# Altium PCB pcb_mpptCharger.PcbDoc
Units mm, origin at the board's own origin, x right, y up, seen from the top; angles counter-clockwise.
Board outline 100 x 100 mm, 2 copper layers (Top Layer, Bottom Layer); 44 components, 22 nets, 103 pads, 14 vias.
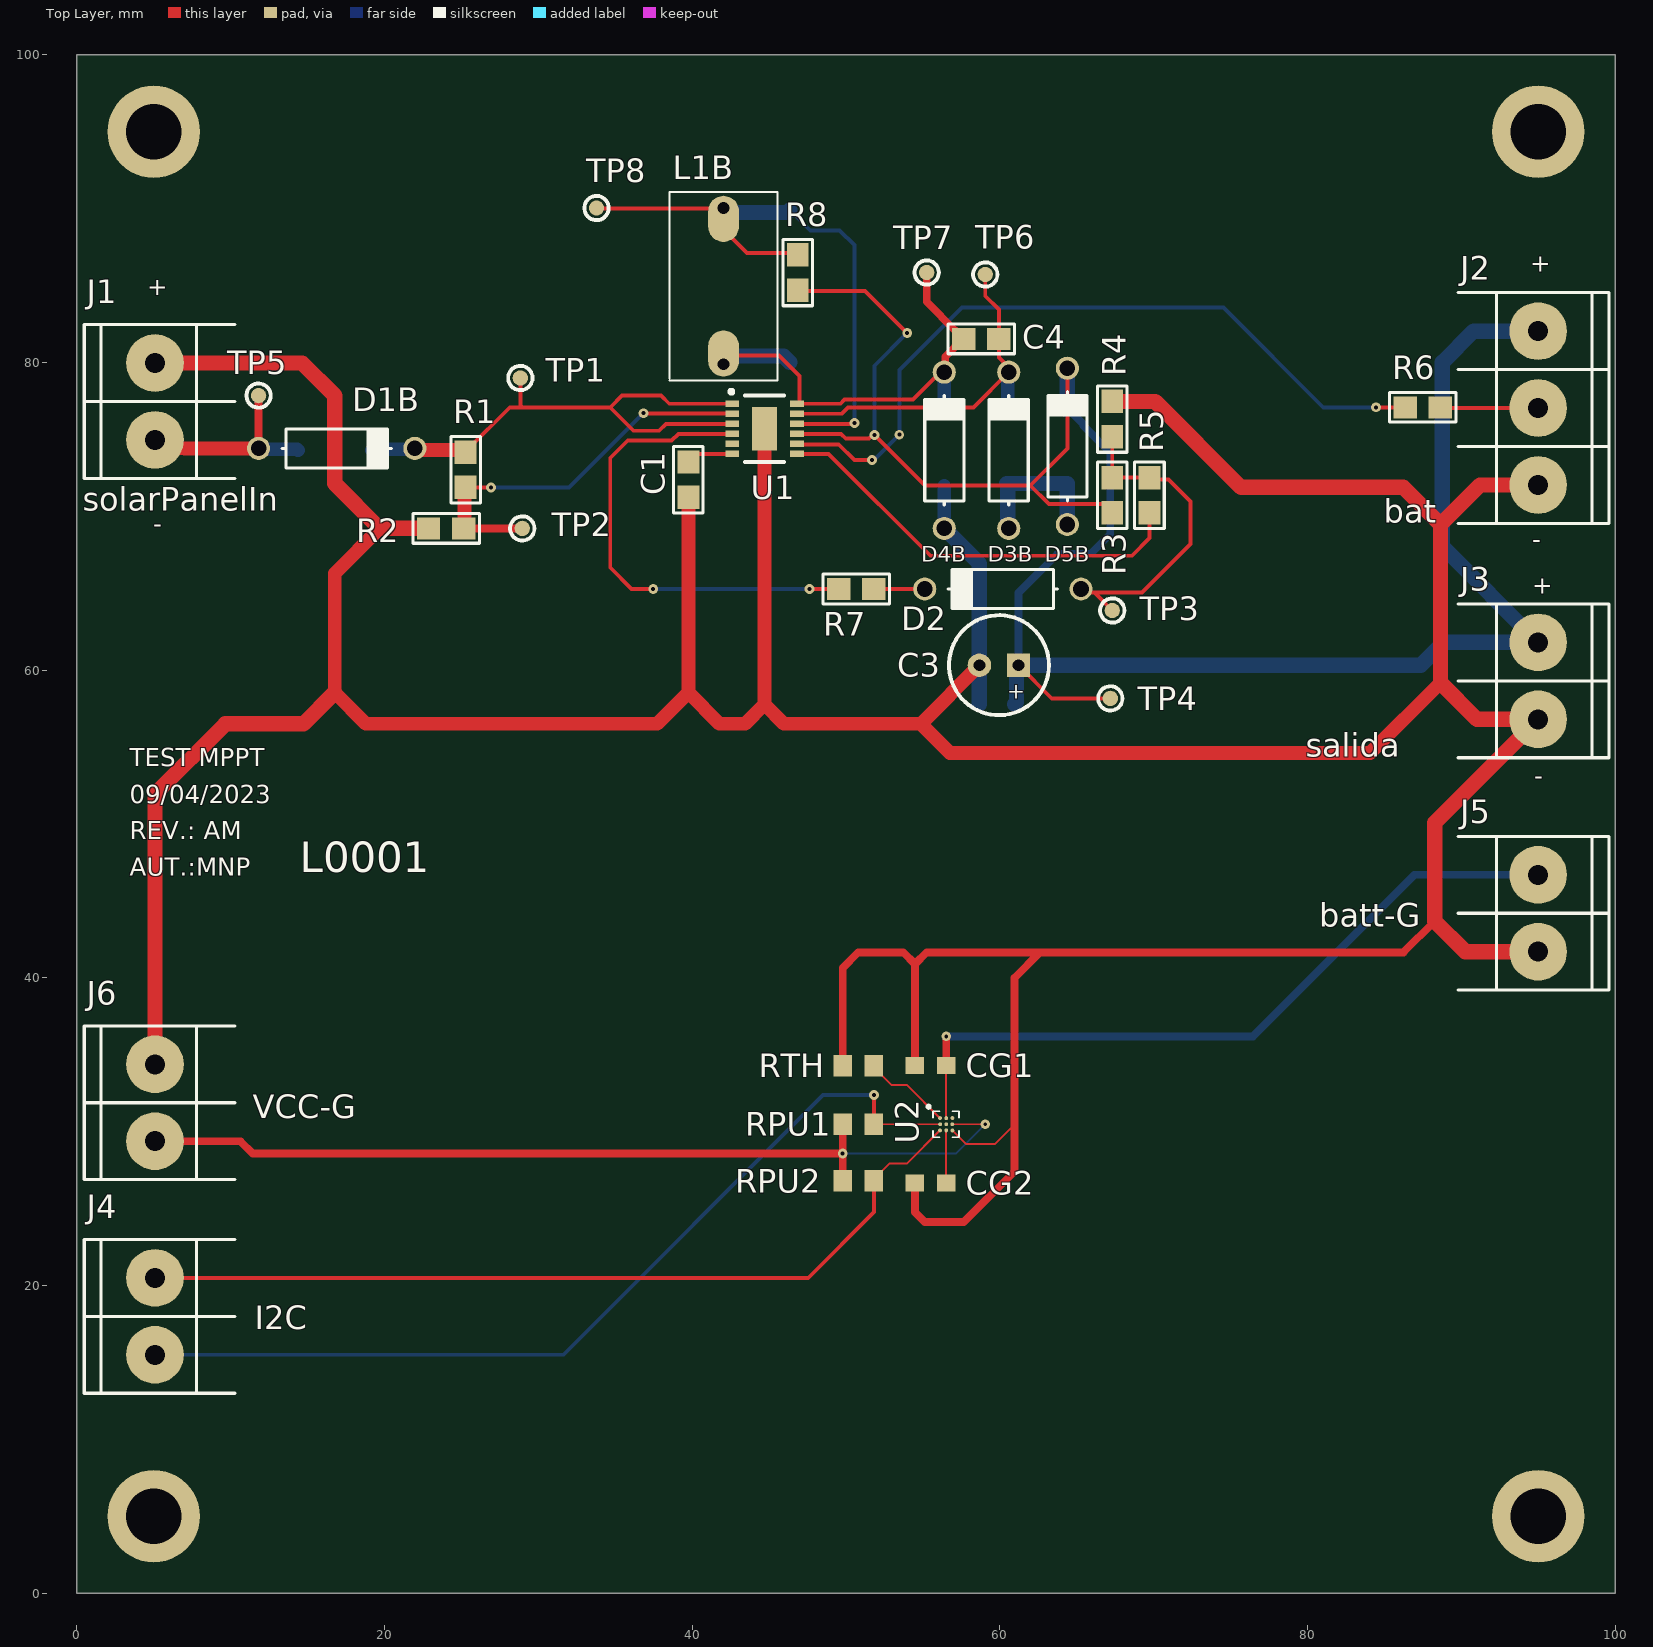
[diagram p0: Top Layer view]
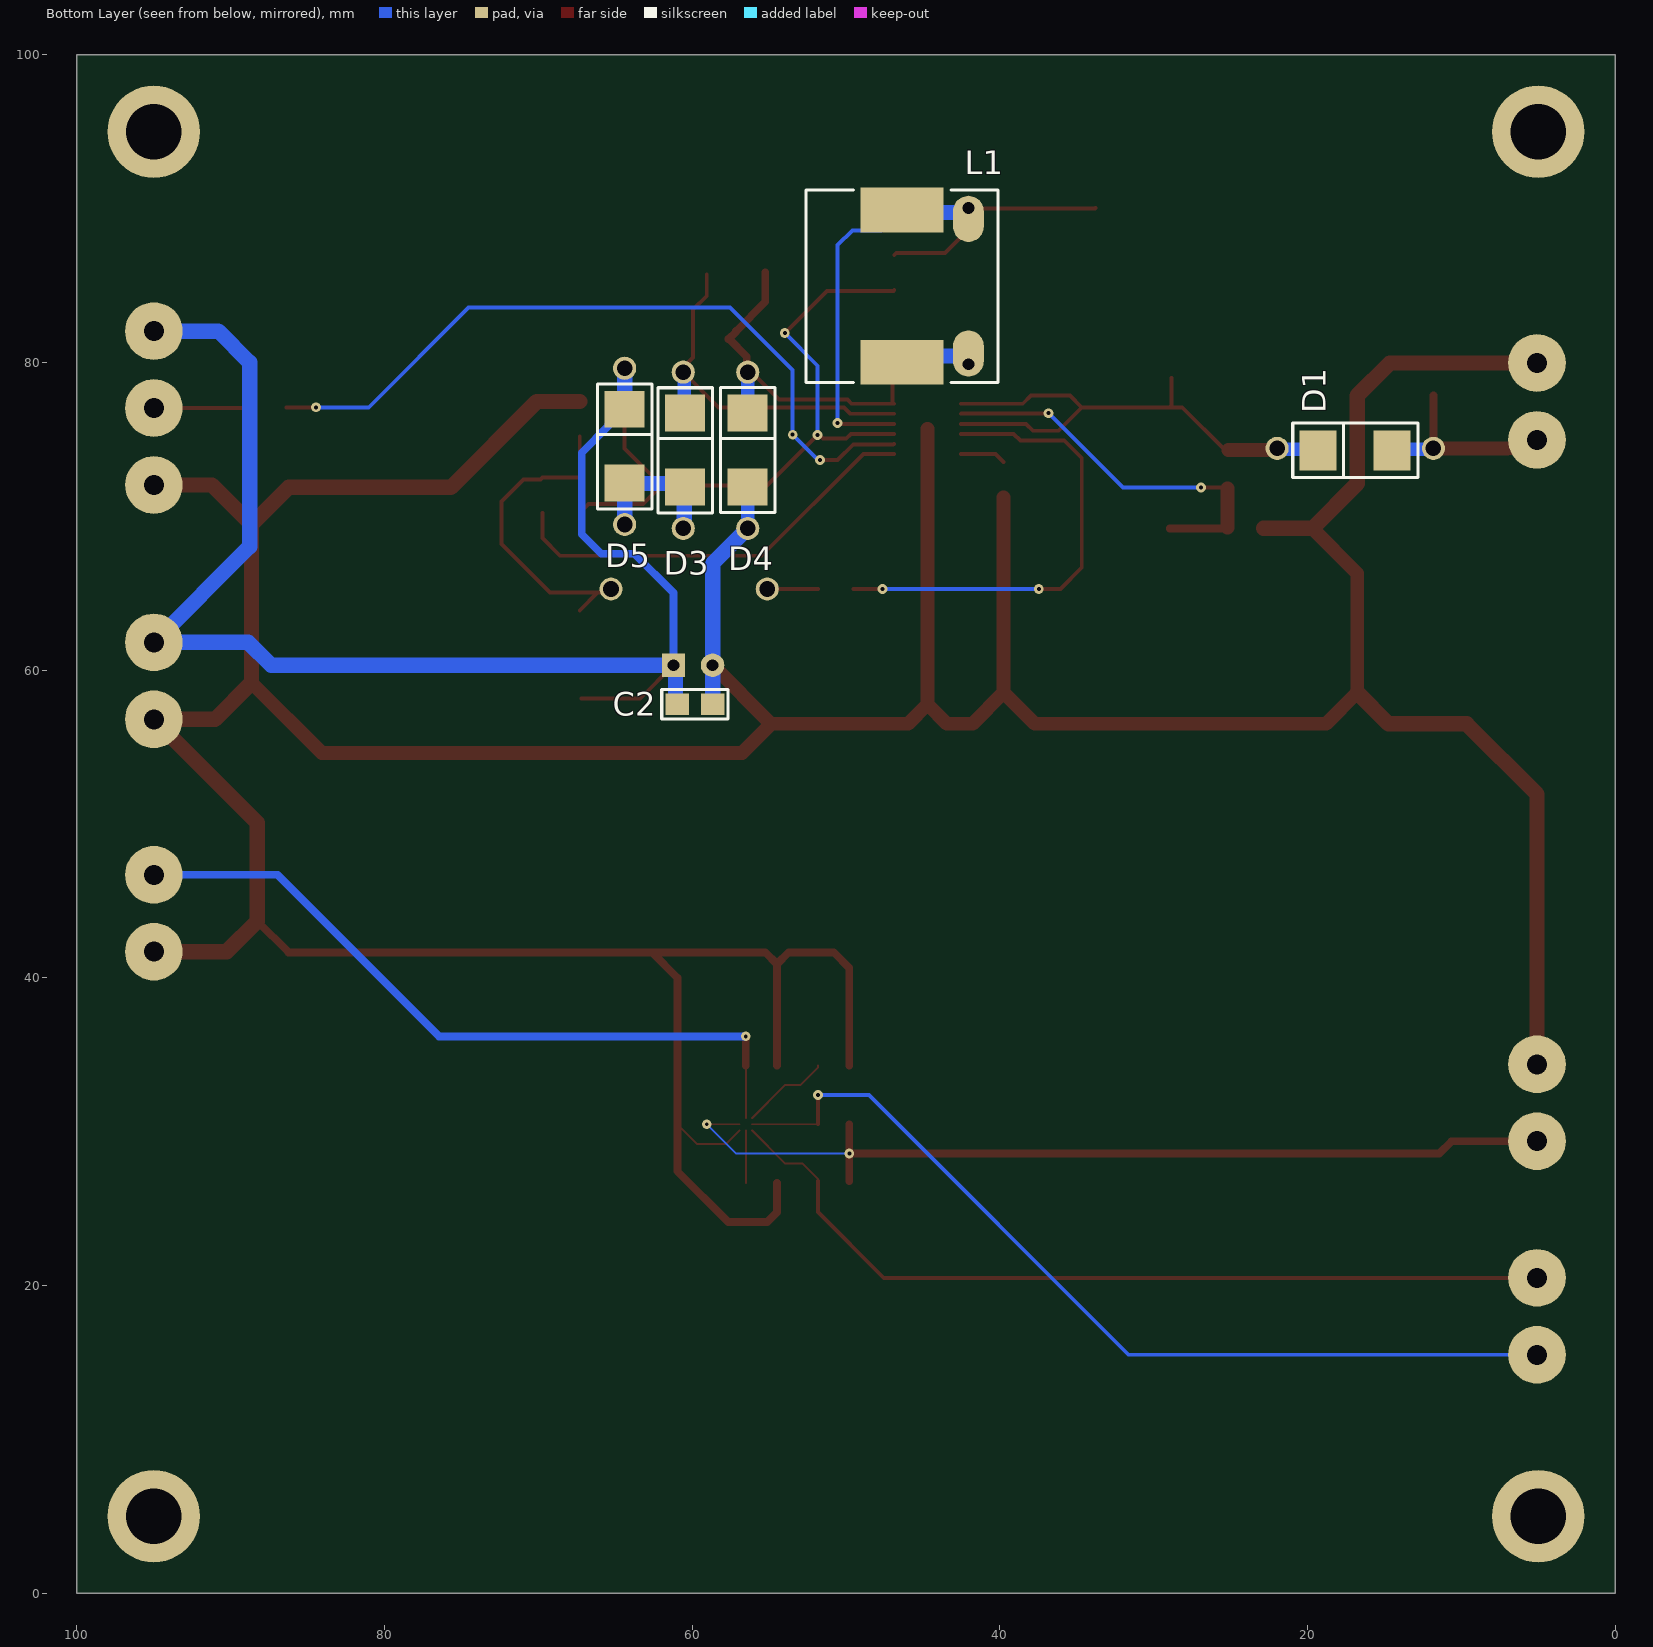
[diagram p1: Bottom Layer view, seen from below]
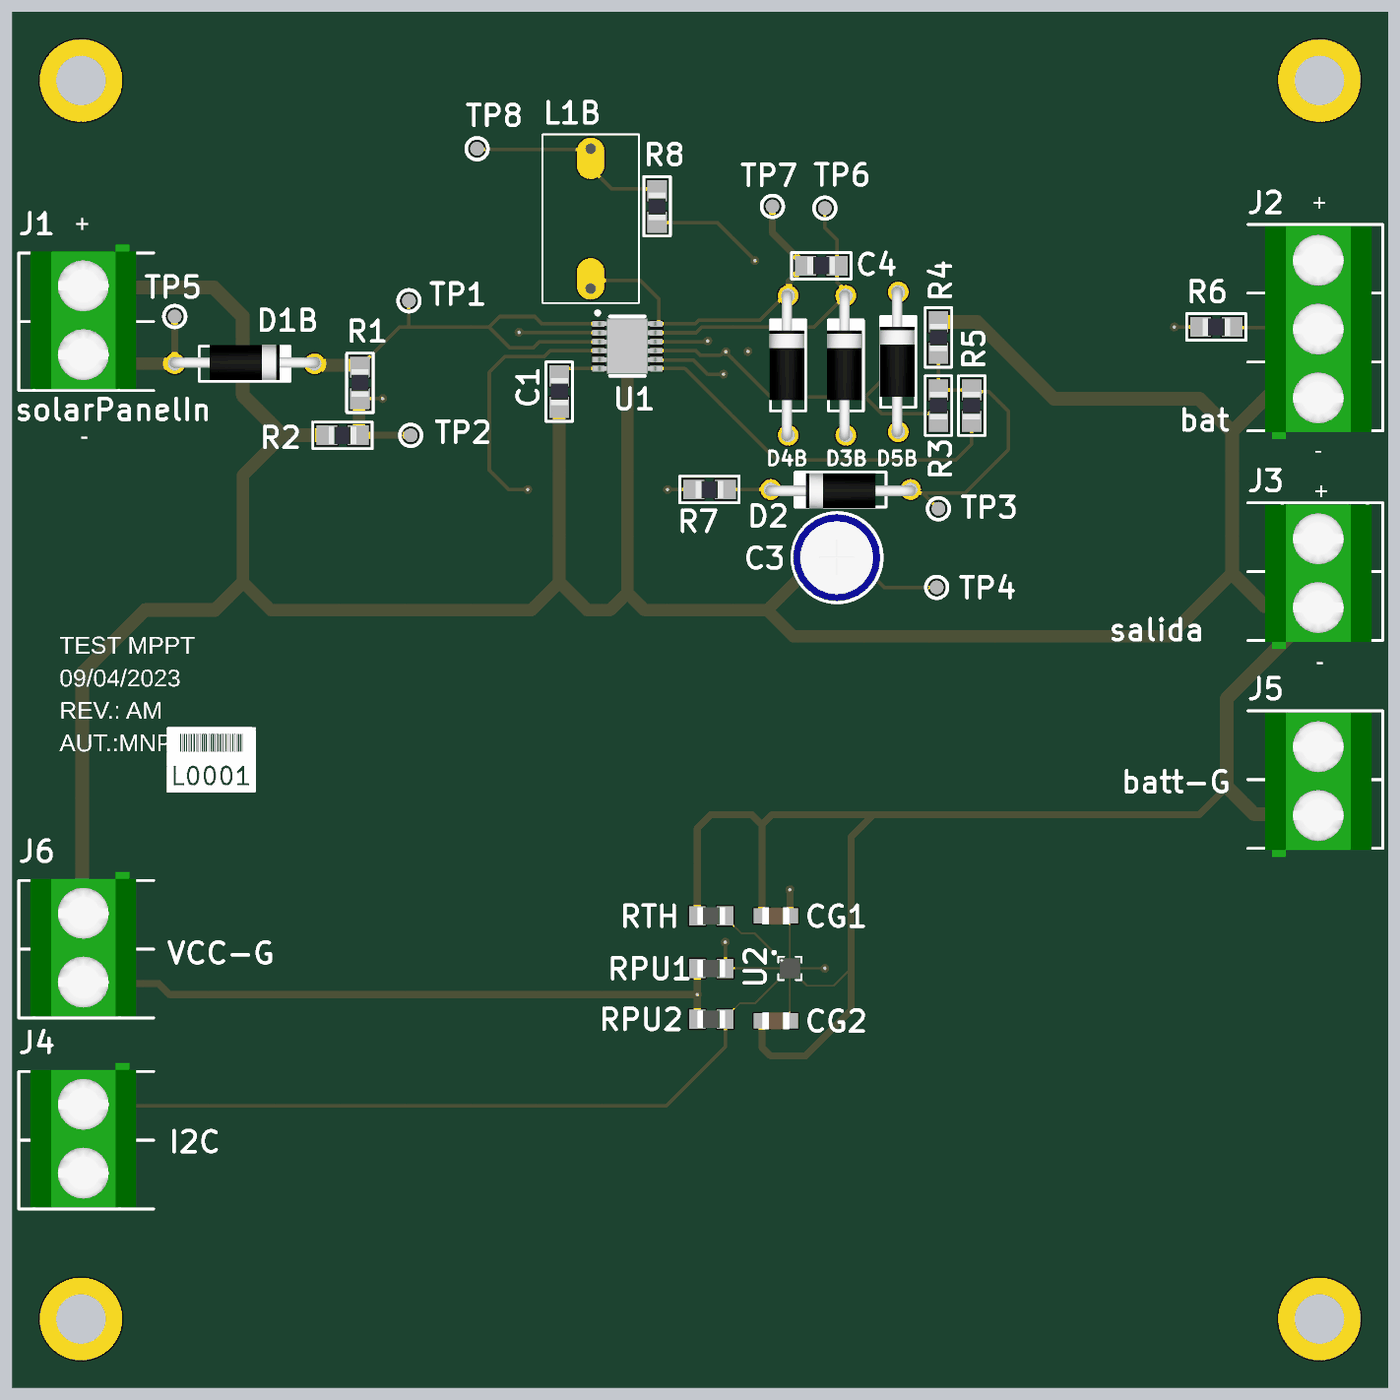
[diagram p2: 3D render of the assembled board from above, using the file's embedded part models]
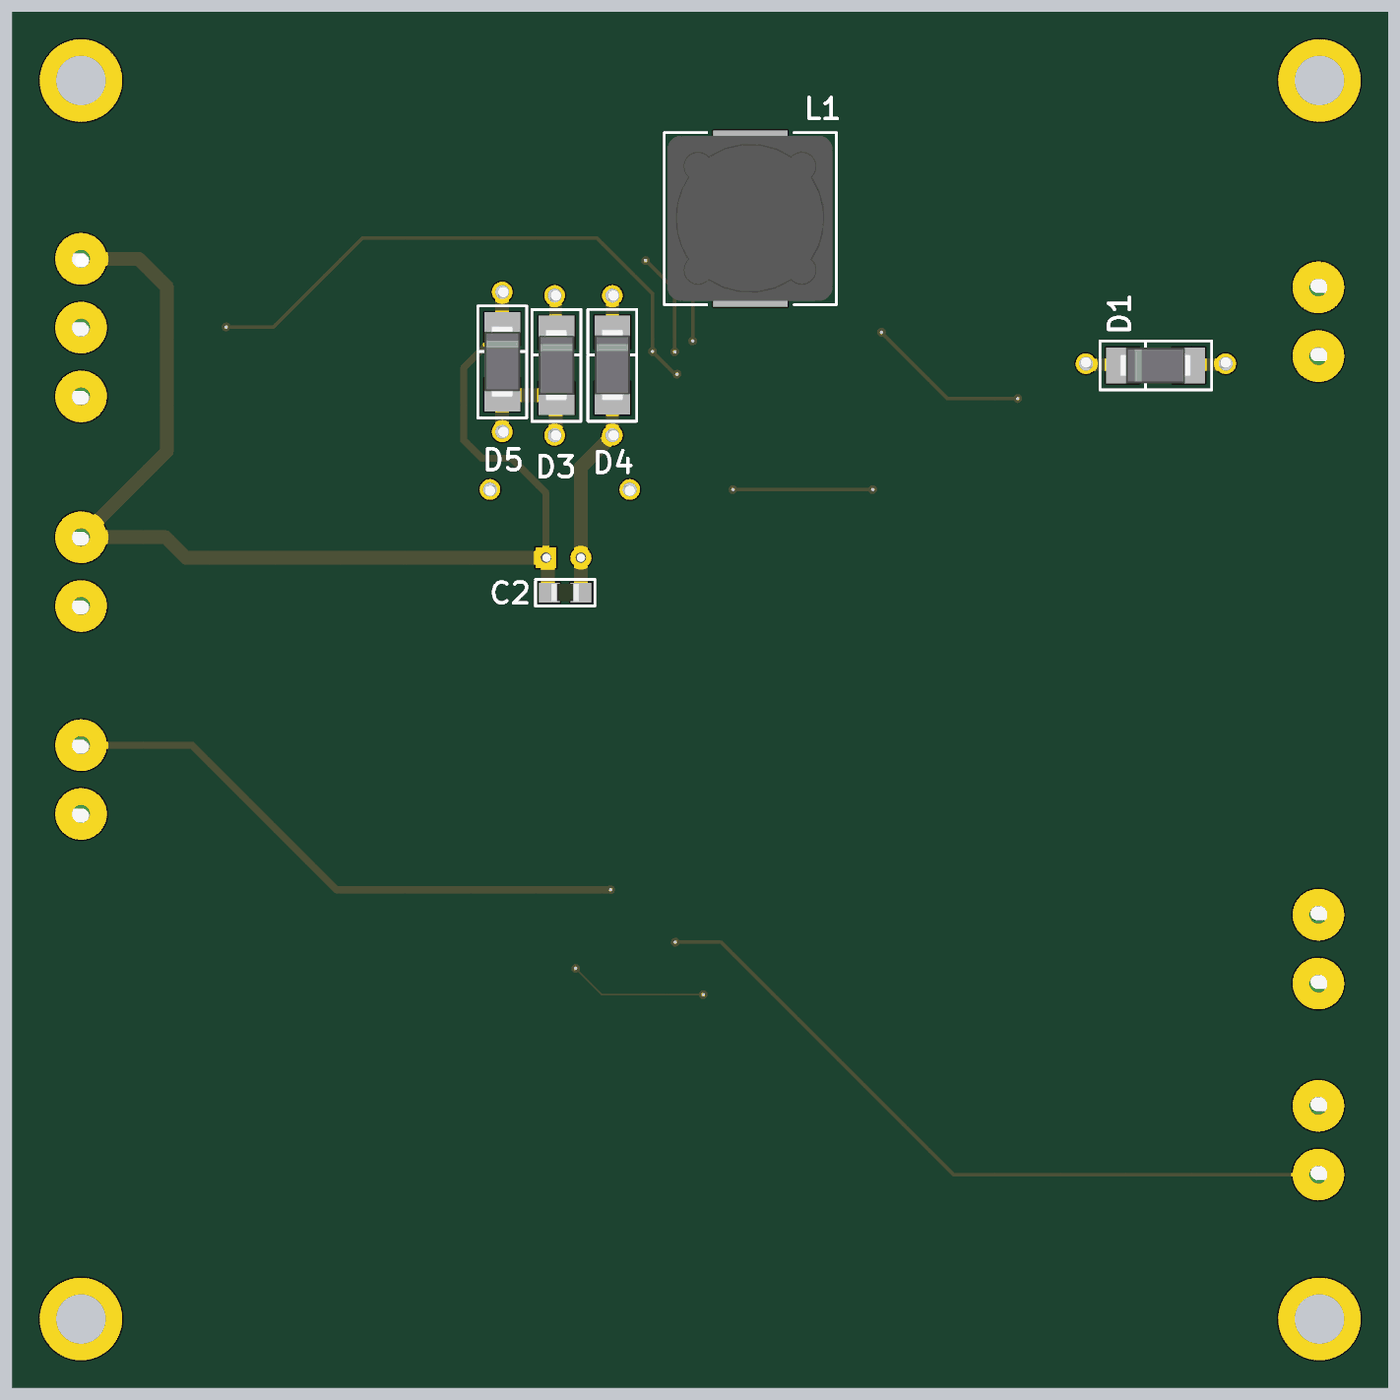
[diagram p3: 3D render of the assembled board from below, using the file's embedded part models]

## Layer stack, top to bottom
Top Solder: solder mask 0.0102, Solder Resist, Dk 3.5
Top Layer: signal copper 0.0356
Dielectric 1: dielectric 0.32, FR-4, Dk 4.8
Bottom Layer: signal copper 0.0356
Bottom Solder: solder mask 0.0102, Solder Resist, Dk 3.5

## Board outline
0,0 100,0 100,100 0,100

## Design rules (kind name [scope] priority, off if disabled: settings)
Clearance [All] p1: gap=0.254 ignorepadtopadclearanceinfootprint=FALSE except(0: Arc-Hole Track-Hole SMDPad-Hole THPad-Hole Via-Hole Fill-Hole Poly-Hole Region-Hole Text-Hole; 0.127: Arc-SMDPad Track-SMDPad SMDPad-SMDPad)
HoleSize [All] p1: absolutevalues=TRUE maxlimit=3.81 minlimit=0.025 maxpercent=80.000 minpercent=20.000
MinimumSolderMaskSliver [All] p1: minsoldermaskwidth=0.102
PolygonConnect [All] p1: connectstyle=Relief reliefconductorwidth=0.254 reliefentries=4 polygonreliefangle="90 Angle" airgapwidth=0.254
RoutingVias [All] p1: holewidth=0.711 width=1.27 viastyle="Through Hole" minholewidth=0.254 minwidth=0.635 maxholewidth=0.711 maxwidth=1.27
SilkToSolderMaskClearance [IsPad] p1: minsilkscreentomaskgap=0.15 clearancetoexposedcopper=TRUE
SolderMaskExpansion [All] p1: expansion=0.102 istentingtop=FALSE
Width [All] p1: maxlimit=1 minlimit=0.127 preferedwidth=0.254
27 further rules are at their usual default settings.

## Components (designator, comment, footprint, x,y, rotation, side; value= is the part's Value field where it differs from the comment)
C1 "CAP" 0805 39.751,72.39 r270 top value=4.7u
C2 "CAP" 0805 59.817,57.785 r180 bottom value=10u
C3 "CAPPOL" CAP100RP2 59.944,60.325 r180 top value=100u
C4 "CAP" 0805 58.801,81.534 r0 top value=1u
CG1 "0.1uF" 0805-CAP-TDK 55.499,34.29 r180 top
CG2 "0.47uF" 0805-CAP-TDK 55.499,26.67 r0 top
D1 "CMSH3-40MA" SMAK 14.504,74.295 r0 bottom
D1B "DIODO SCHOTTKY" DO41 16.891,74.422 r0 top
D2 "DIODO" DO41 60.198,65.278 r180 top value=1n4148
D3 "CMSH3-40MA" SMAK 60.452,71.907 r90 bottom
D3B "DIODO SCHOTTKY" DO41 60.579,74.295 r90 top
D4 "CMSH3-40MA" SMAK 56.388,71.917 r90 bottom
D4B "DIODO SCHOTTKY" DO41 56.388,74.295 r90 top
D5 "CMSH3-40MA" SMAK 64.389,72.161 r90 bottom
D5B "DIODO SCHOTTKY" DO41 64.389,74.549 r90 top
J1 "solarPanelIn" BORNERA2 5.08,77.47 r0 top
J2 "bat" BORNERA3 94.996,77.042 r180 top
J3 "salida" BORNERA2 94.996,59.309 r180 top
J4 "I2C" BORNERA2 5.08,17.994 r0 top
J5 "batt-G" BORNERA2 94.996,44.196 r180 top
J6 "VCC-G" BORNERA2 5.08,31.877 r0 top
L1 "INDUCTOR" "WE-PD SERIES" 46.355,84.963 r270 bottom
L1B "INDUCTOR_FM" INDUCTOR_FM 42.037,84.963 r270 top
R1 "RES" 0805 25.273,73.025 r90 top value=TBD
R2 "RES" 0805 24.003,69.215 r0 top value=TBD
R3 "RES" 0805 67.31,71.374 r270 top value=TBD
R4 "RES" 0805 67.31,76.327 r270 top value=TBD
R5 "RES" 0805 69.723,71.374 r270 top value=TBD
R6 "RES" 0805 87.503,77.089 r180 top value=TBD
R7 "RES" 0805 50.673,65.278 r180 top value=TBD
R8 "RES" 0805 46.863,85.852 r90 top value=TBD
RPU1 "2K2" 0805-RES-PANASONIC 50.8,30.48 r0 top
RPU2 "2K2" 0805-RES-PANASONIC 50.8,26.797 r180 top
RTH "TBD" 0805-RES-PANASONIC 50.8,34.29 r0 top
TP1 "TP" TP 28.829,78.994 r0 top
TP2 "TP" TP 28.956,69.215 r90 top
TP3 "TP" TP 67.31,63.881 r90 top
TP4 "TP" TP 67.183,58.166 r90 top
TP5 "TP" TP 11.811,77.851 r90 top
TP6 "TP" TP 59.055,85.725 r90 top
TP7 "TP" TP 55.245,85.852 r90 top
TP8 "TP" TP 33.782,90.043 r90 top
U1 "LT3652EMSE#PBF" LT3652EMSE#PBF 44.704,75.692 r0 top
U2 "MAX17262REWL+T" "AD 9-WLP" 56.515,30.48 r0 top

## Footprints (in the part's own frame and the unit in brackets; to place one, negate y for a bottom-side part, rotate by r counter-clockwise, add the part's x,y. Pads: shape width x height; smd on the part's side, far side on the other; paste and mask are expansions set on the pad)
0805 [mil] "Pasivo 0805"
  rect 60x56 smd: 1(-45,0) 2(45,0)
  silkscreen extent -85,-38 85,38, body extent -40,-25 39,25, height 15
0805-CAP-TDK [mm]
  rect 1.2x1.1 smd: 1(-1.016,0) 2(1.016,0)
  body extent -1,-0.63 1,0.63, height 1.45
0805-RES-PANASONIC [mm]
  rect 1.2x1.4 smd: 1(-1.016,0) 2(1.016,0)
  body extent -1,-0.63 1,0.63, height 0.6
"AD 9-WLP" [mm]
  round 0.25 smd mask+0.1: A1(-0.4,0.4) A2(0,0.4) A3(0.4,0.4) B1(-0.4,0) B2(0,0) B3(0.4,0) C1(-0.4,-0.4) C2(0,-0.4) C3(0.4,-0.4)
  silkscreen extent -1.24,-0.84 0.84,1.24, body extent -0.73,-0.72 0.73,0.72, height 0.69
BORNERA2 [mm] "Bornera con Tornillos 5mm separación"
  round 3.75 hole 1.3: 1(0,2.5) 2(0,-2.5)
  silkscreen extent -4.6,-5 5.2,5, body extent -3.76,-4.89 3.94,5.61, height 10
BORNERA3 [mm] "Bornera con Tornillos 5mm separación"
  round 3.75 hole 1.3: 1(0,5) 2(0,0) 3(0,-5)
  silkscreen extent -4.6,-7.5 5.2,7.5, body extent -3.76,-7.39 3.94,8.11, height 10.05
CAP100RP2 [mil] "Body diameter 6.5mm"
  rect 60x60 hole 30: 1(-50,0)
  round 60 hole 30: 2(50,0)
  silkscreen extent -128,-128 128,128, body extent -124,-125 126,125, height 454
DO41 [mm]
  round 1.5 hole 1.016: 1(-5.08,0) 2(5.08,0)
  silkscreen extent -3.56,-1.27 3.56,1.27, body extent -5.46,-1.19 5.46,1.37, height 2.03
INDUCTOR_FM [mm]
  oval 3x2 hole 0.762 copper offset 0.7,0: 1(-5.08,0)
  oval 3x2 hole 0.762 copper offset -0.7,0: 2(5.08,0)
  silkscreen extent -6.13,-3.5 6.13,3.5
LT3652EMSE#PBF [mm]
  rect 0.889x0.42 smd mask+0.07: 1(-2.107,1.625) 2(-2.107,0.975) 3(-2.107,0.325) 4(-2.107,-0.325) 5(-2.107,-0.975) 6(-2.107,-1.625) 7(2.107,-1.625) 8(2.107,-0.975) 9(2.107,-0.325) 10(2.107,0.325) 11(2.107,0.975) 12(2.107,1.625)
  rect 1.651x2.845 smd mask+0.07: 13(0,0)
  silkscreen extent -2.29,-2.16 1.27,2.54, body extent -2.45,-2.02 2.45,2.02, height 1.1
SMAK [mm]
  rect 2.4x2.6 smd: 1(0,0) 2(4.8,0)
  silkscreen extent -1.68,-1.78 6.45,1.78, body extent -0.19,-1.3 5.01,1.3, height 2.4
TP [mm]
  round 1 smd: 1(0,0)
  silkscreen extent -0.79,-0.79 0.79,0.79
"WE-PD SERIES" [mm] "POWER-CHOKE WE-PD"
  rect 2.9x5.4 smd: 1(-4.95,0) 2(4.95,0)
  silkscreen extent -6.25,-6.25 6.25,6.25, body extent -6.03,-6.03 5.97,5.97, height 7.95

## Part data
CG1 CG2: library part CAP-SMD
D1 D3 D4 D5: library part "DIODO SCHOTTKY"
J1 J3 J4 J5 J6: library part "BORNERA 2"
J2: library part "BORNERA 3"
L1B: library part INDUCTOR_1
RPU1 RPU2 RTH: library part RES-SMD
U1: "Power Tracking 2A Battery Charger for Solar Power"
U2: "Battery Fuel Gauge IC LiFePO4/Li-ion 9-WLP (1.47x1.45)"

## Free pads (board coordinates)
  round 6 hole 3.6: 6(5,5) 6(5,95) 6(95,5) 6(95,95)

## Via types
v1: diameter 0.635, hole 0.254, Top Layer to Bottom Layer, tented both sides, 14 vias

## Nets (pads, with @x,y where several pads share a name; then routed paths per layer and width w, separated by ;. In a path a pad name is that pad's centre, name@x,y a point inside that pad or via, vN(x,y) a via of type N, cw(c..) or ccw(c..) an arc to the next point about the centre after c; other vN are vias at no path point)
BAT_TEMP: J2.2 R6.1 | length 6.4
  Top Layer w0.254: R6.1 88.693,77.042 J2.2
BATT_G: CG1.1 J5.2 U2.A2 | length 48.1
  Top Layer w0.127: U2.A2 CG1.1
  Top Layer w0.508: CG1.1 v1(56.515,36.195)
  Bottom Layer w0.508: v1(56.515,36.195) 76.454,36.195 86.955,46.696 J5.2
GND: C1.2 C2.2 C3.2 CG1.2 CG2.1 D4.1 D4B.1 J1.1 J2.1 J3.1 J5.1 J6.1 R2.1 R4.1 RTH.1 U1.13 U2.C3 | length 355
  Top Layer w0.127: U2.C3 57.785,29.21 59.69,29.21 60.96,30.48
  Top Layer w0.508: RTH.1 49.784,40.64 50.8,41.656 53.721,41.656 54.483,40.894 ; CG2.1 54.483,24.765 55.118,24.13 57.658,24.13 60.96,27.432 60.96,30.48 60.96,40.005 62.611,41.656 ; CG1.2 54.483,40.894 ; 88.265,43.688 86.233,41.656 62.611,41.656 ; 54.483,40.894 55.245,41.656 62.611,41.656
  Top Layer w0.9: 19.685,69.215 16.764,66.294 16.764,58.547 18.796,56.515 37.719,56.515 39.751,58.547 ; C1.2 39.751,58.547 ; U1.13 44.704,57.785 ; C3.2 54.864,56.515 ; 88.646,59.182 84.074,54.61 56.769,54.61 54.864,56.515 ; 39.751,58.547 41.783,56.515 43.434,56.515 44.704,57.785 ; 44.704,57.785 45.974,56.515 54.864,56.515
  Top Layer w1: J6.1 5.08,51.943 9.652,56.515 14.732,56.515 16.764,58.547 ; J1.1 14.645,79.97 16.764,77.851 16.764,72.136 19.685,69.215 R2.1 ; R4.1 70.104,77.47 75.692,71.882 86.233,71.882 88.646,69.469 ; J5.1 90.257,41.696 88.265,43.688 88.265,50.078 J3.1 91.019,56.809 88.646,59.182 88.646,69.469 ; J2.1 91.219,72.042 88.646,69.469
  Bottom Layer w0.9: D4B.1 D4.1@56.388,71.969
  Bottom Layer w1: D4B.1 58.674,66.929 C3.2 C2.2
NetC1_1: C1.1 U1.6 | length 3
  Top Layer w0.254: C1.1 40.284,74.066 U1.6@42.52,74.066
NetC4_1: C4.1 D4.2 D4B.2 L1.2 L1B.2 TP7.1 U1.12 | length 33.1
  Top Layer w0.254: L1B.2@42.037,80.137 42.364,80.464 45.647,80.464 46.99,79.121 46.99,77.406 U1.12@46.901,77.318 ; U1.12@46.888,77.318 U1.12@46.901,77.318 ; D4B.2 56.134,79.375 54.356,77.597 49.915,77.597 49.635,77.318 U1.12@46.901,77.318
  Top Layer w0.5: TP7.1 55.245,83.947 57.146,82.046 57.146,81.995 C4.1@57.607,81.534 ; D4B.2 56.452,79.439 56.452,80.379 C4.1@57.607,81.534 ; C4.1 C4.1@57.607,81.534
  Bottom Layer w0.9: D4.2@56.388,76.769 D4B.2
  Bottom Layer w1: L1B.2@42.037,80.137 42.325,80.425 45.943,80.425 L1.2
NetC4_2: C4.2 D3.2 D3B.2 TP6.1 U1.11 | length 24.3
  Top Layer w0.254: U1.11@46.888,76.667 49.704,76.667 50.125,77.089 58.293,77.089 D3B.2 60.579,79.704 59.944,80.339 C4.2 59.944,83.439 59.055,84.328 TP6.1
  Bottom Layer w0.9: D3.2@60.452,76.936 60.515,77 60.515,79.311 D3B.2
NetCG2_2: CG2.2 U2.C2 | length 3.4
  Top Layer w0.127: CG2.2 U2.C2
NetD1_2: D1.2 D1B.2 R1.2 TP1.1 U1.1 U1.3 | length 35.8
  Top Layer w0.254: R1.2@25.134,74.307 25.361,74.307 28.143,77.089 28.956,77.089 ; TP1.1 28.829,77.216 28.956,77.089 ; U1.3@42.52,76.017 38.298,76.017 37.846,75.565 36.195,75.565 34.671,77.089 ; U1.1@42.52,77.318 38.51,77.318 37.976,77.851 35.433,77.851 34.671,77.089 ; 28.956,77.089 34.671,77.089
  Top Layer w0.9: D1B.2 22.086,74.307 R1.2@25.134,74.307
  Bottom Layer w0.9: D1.2@19.177,74.295 19.241,74.358 21.907,74.358 D1B.2
NetD2_1: D2.1 R3.1 R4.2 R5.1 TP3.1 | length 21.3
  Top Layer w0.254: D2.1 65.516,65.04 66.151,65.04 ; TP3.1 66.151,65.04 ; R4.2 R3.1 R5.1 69.85,72.39 70.971,72.39 72.39,70.971 72.39,68.199 69.231,65.04 66.151,65.04
NetD2_2: D2.2 R7.1 | length 3.3
  Top Layer w0.254: R7.1 D2.2
NetD3_1: D3.1 D3B.1 D5.1 D5B.1 | length 9.6
  Bottom Layer w1: D3B.1 60.515,69.278 60.515,72.072 60.452,72.136 64.389,72.136 D5B.1
NetL1_1: L1.1 L1B.1 R8.2 TP8.1 U1.10 | length 40.6
  Top Layer w0.254: TP8.1 33.819,90.006 41.746,90.006 42.037,90.297 42.037,88.646 43.561,87.122 46.736,87.122 R8.2 ; U1.10@46.888,76.017 50.49,76.017 v1(50.546,76.073)
  Bottom Layer w0.254: L1.1 47.678,88.59 49.586,88.59 50.546,87.63 v1(50.546,76.073)
  Bottom Layer w1: L1B.1@42.037,90.297 42.037,90.217 42.499,89.755 46.197,89.755 L1.1
NetR1_1: R1.1 R2.2 TP2.1 U1.2 | length 25.7
  Top Layer w0.254: R1.1@25.209,71.819 R1.1 v1(26.924,71.882) ; v1(36.83,76.708) 36.851,76.687 42.499,76.687 U1.2@42.52,76.667
  Top Layer w0.5: R2.2@25.209,69.278 25.273,69.215 TP2.1
  Top Layer w0.9: R2.2@25.209,69.278 R1.1@25.209,71.819
  Bottom Layer w0.254: v1(26.924,71.882) 32.004,71.882 v1(36.83,76.708)
NetR5_2: R5.2 U1.7 | length 27.7
  Top Layer w0.254: U1.7@46.888,74.066 48.87,74.066 55.499,67.437 68.58,67.437 69.723,68.58 R5.2
NetR6_2: R6.2 U1.8 | length 49.2
  Top Layer w0.254: U1.8@46.888,74.717 46.929,74.676 49.53,74.676 50.546,73.66 v1(51.689,73.66) ; v1(84.455,77.089) R6.2
  Bottom Layer w0.254: v1(51.689,73.66) 51.81,73.66 52.009,73.859 52.015,73.859 v1(53.467,75.311) 53.467,79.502 57.531,83.566 74.549,83.566 81.026,77.089 v1(84.455,77.089)
NetR7_2: R7.2 U1.4 | length 31.1
  Top Layer w0.254: v1(37.465,65.278) 36.068,65.278 34.671,66.675 34.671,73.787 35.814,74.93 38.663,74.93 39.099,75.367 U1.4@42.52,75.367 ; v1(47.625,65.278) R7.2
  Bottom Layer w0.254: v1(37.465,65.278) v1(47.625,65.278)
NetRTH_2: RTH.2 U2.A1 | length 5.8
  Top Layer w0.127: RTH.2 51.816,34.19 52.986,33.02 53.97,33.02 56.11,30.88 U2.A1
SCL: J4.2 RPU1.2 U2.B1 | length 59.9
  Top Layer w0.127: RPU1.2 U2.B1
  Top Layer w0.254: RPU1.2 v1(51.816,32.385)
  Bottom Layer w0.254: J4.2 31.623,15.494 48.514,32.385 v1(51.816,32.385)
SDA: J4.1 RPU2.1 U2.C1 | length 56.3
  Top Layer w0.127: RPU2.1 51.816,26.897 52.859,27.94 53.97,27.94 56.11,30.08 U2.C1
  Top Layer w0.254: J4.1 47.545,20.494 51.816,24.765 RPU2.1
VBAT: C2.1 C3.1 D5.2 D5B.2 J2.3 J3.2 R3.2 R8.1 TP4.1 U1.9 | length 143.1
  Top Layer w0.254: R8.1 46.914,84.658 51.232,84.658 v1(53.975,81.915) ; U1.9@46.888,75.367 49.674,75.367 49.983,75.057 51.5,75.057 51.732,75.289 v1(51.853,75.289) 55.133,72.009 61.976,72.009 ; C3.1 63.373,58.166 TP4.1 ; D5B.2 64.389,74.422 61.976,72.009 ; R3.2 66.748,70.793 63.192,70.793 61.976,72.009
  Bottom Layer w0.254: v1(51.853,75.289) 51.853,79.793 v1(53.975,81.915)
  Bottom Layer w0.5: C3.1 61.214,65.024 63.754,67.564 65.913,67.564 67.183,68.834 67.183,74.142 65.439,75.886 65.439,75.986 64.489,76.936 D5.2@64.389,76.936
  Bottom Layer w1: C2.1 61.087,57.912 61.087,60.198 C3.1 87.376,60.325 88.86,61.809 J3.2 88.773,68.032 88.773,80.01 90.805,82.042 J2.3 ; D5.2@64.389,76.936 D5B.2
VCC: D1.1 D1B.1 J1.2 TP5.1 | length 13
  Top Layer w0.508: D1B.1 TP5.1
  Top Layer w0.9: J1.2 5.625,74.425 7.03,74.425 7.032,74.422 D1B.1
  Bottom Layer w0.9: D1B.1 11.874,74.358 14.313,74.358 D1.1@14.377,74.295
VCC_G: J6.2 RPU1.1 RPU2.2 U2.B3 | length 60.9
  Top Layer w0.127: U2.B3 v1(59.055,30.48)
  Top Layer w0.508: J6.2 10.628,29.377 11.43,28.575 v1(49.784,28.575) ; RPU2.2 v1(49.784,28.575) ; RPU1.1 v1(49.784,28.575)
  Bottom Layer w0.127: v1(49.784,28.575) 57.15,28.575 v1(59.055,30.48)
pads on no net: U1.5 U2.A3 U2.B2

## Silkscreen, mask and mechanical layers (free items; w line width, h text height)
Top Overlay:
  text "+" at 94.488,85.518 h2
  text "+" at 4.572,83.994 h2
  text "-" at 4.953,68.576 h2
  text "-" at 94.615,67.56 h2
  text "+" at 94.615,64.563 h2
  text "TEST MPPT" at 3.429,53.362 h2
  text "-" at 94.742,52.193 h2
  text "09/04/2023" at 3.429,50.969 h2
  text "REV.: AM" at 3.429,48.621 h2
  text "L0001" at 14.478,46.863 h2
  text "AUT.:MNP" at 3.429,46.25 h2
Top Solder:
  rectangle: 46.297,73.787 47.326,77.597
  rectangle: 42.082,73.787 43.111,77.597
Mechanical 1:
  the board outline again, w0.254

## Text inside footprints (layer, text, board x,y; h text height)
C3: Top Overlay "+" at 61.646,59.03 h1.02 r180